# EAGLE board Voltometria Ciclica (EAGLE 7.6.0)

Size 73.58 x 101.49 mm. Coordinates in mm from the lower left corner, seen from the top.
Outline: 0,0 56.82,0 56.82,53.33 0,53.33 0,0
Copper layers (1*16): Top 0.035mm / dielectric 1.5mm / Bottom 0.035mm
Design rules "default": minimum track width 10mil, minimum drill 24mil, track to track 8mil, track to pad 8mil, pad to pad 8mil, via to via 8mil, smd to smd 8mil, copper to edge 40mil, drill to drill 8mil, minimum pad ring 10mil, minimum via ring 8mil, stop-mask expansion 4mil, vias tented up to drill 0mil, thermal gap 10mil

## Footprints (pad centres in the part's own frame; a part is rotated, then mirrored left to right if it is on the bottom)
C5B2.5 = drill 0.813 pad 1.6 octagon: 1 -2.54,0; 2 2.54,0
LED5MM = drill 0.813 octagon: A -1.27,0; K 1.27,0
DC-POWER = drill 0.889 pad 2.54 octagon: + 0,2.54; - 0,-2.54
2P-2.54-65/35MIL = drill 0.889 pad 1.651 square: 1 0,1.27 | drill 0.889 pad 1.651: 2 0,-1.27
0207/10 = drill 0.813 octagon: 1 -5.08,0; 2 5.08,0
B25V = drill 0.813 long: A 2.54,0.635; E -2.54,0.635; S 0,0.635
DIL08 = drill 0.813 pad 1.27: 1 -3.81,-3.81; 2 -1.27,-3.81; 3 1.27,-3.81; 4 3.81,-3.81; 5 3.81,3.81; 6 1.27,3.81; 7 -1.27,3.81; 8 -3.81,3.81
ARDUINO_UNO = drill 1.016 pad 1.88: 0 63.5,50.8; 1 60.96,50.8; 2 58.42,50.8; 3 55.88,50.8; 3.3V 35.56,2.54; 4 53.34,50.8; 5 50.8,50.8; 5V 38.1,2.54; 6 48.26,50.8; 7 45.72,50.8; 8 41.656,50.8; 9 39.116,50.8; 10 36.576,50.8; 11 34.036,50.8; 12 31.496,50.8; 13 28.956,50.8; A0 50.8,2.54; A1 53.34,2.54; A2 55.88,2.54; A3 58.42,2.54; A4 60.96,2.54; A5 63.5,2.54; AREF 23.876,50.8; GND 26.416,50.8; GND. 43.18,2.54; GND.. 40.64,2.54; I/OREF 30.48,2.54; N/C 27.94,2.54; RESET 33.02,2.54; SCL 18.796,50.8; SDA 21.336,50.8; VIN 45.72,2.54 | hole 3.2: 66.04,7.62; 66.04,35.56; 15.24,50.8; 13.97,2.54
D-7.5 = drill 0.813 long: A 3.81,0; C -3.81,0

## Placement (x,y rotation side)
C1  470nF  [C5B2.5]  5,98.98 0 top
C2  100nF  [C5B2.5]  5,137.08 0 top  (outside the outline)
C3  100nF  [C5B2.5]  5,187.88 0 top  (outside the outline)
D1  [LED5MM]  5,213.28 0 top  (outside the outline)
Meter6  [DC-POWER]  5,276.78 0 top  (outside the outline)
P1  5V  [2P-2.54-65/35MIL]  5,225.98 0 top  (outside the outline)
P2  5V  [2P-2.54-65/35MIL]  5,264.08 0 top  (outside the outline)
P4  5V  [2P-2.54-65/35MIL]  5,251.38 0 top  (outside the outline)
R1  10k‎Ω  [0207/10]  5,60.88 0 top
R2  510‎Ω  [0207/10]  5,111.68 0 top  (outside the outline)
R3  200‎Ω  [0207/10]  5,124.38 0 top  (outside the outline)
R4  1k‎Ω  [0207/10]  5,149.78 0 top  (outside the outline)
R5  24k‎Ω  [0207/10]  5,162.48 0 top  (outside the outline)
R6  12k‎Ω  [0207/10]  5,175.18 0 top  (outside the outline)
R7  200k‎Ω  [0207/10]  5,238.68 0 top  (outside the outline)
Rpot2  250k‎Ω  [B25V]  5,289.48 0 top  (outside the outline)
U2  [DIL08]  5,10.08 0 top
U5  [ARDUINO_UNO]  5,48.18 0 top
U6  [DIL08]  5,22.78 0 top
U7  [DIL08]  5,35.48 0 top
U8  [DIL08]  5,73.58 0 top
U9  [DIL08]  5,86.28 0 top
U10  [D-7.5]  5,200.58 0 top  (outside the outline)

## Library data of the parts
C1-C3 D1 Meter6 P1 P2 P4 R1-R7 Rpot2 U2 U5-U10 = AUTODESK_CIRCUITS_BREADBOARD

## Nets
N$1: Meter6.+ R1.2 U5.10
N$2: C1.1 R1.1 U6.3
N$3: U6.5
N$4: U6.1
N$5: U6.8
N$6: R2.2 U6.2 U6.6
N$7: C2.1 R2.1 R3.2 R4.1 U2.2
N$8: U8.5
N$9: U8.1
N$10: U8.8
N$11: C2.2 R3.1 U2.6 U8.3
N$12: U2.5
N$13: U2.1
N$14: U2.8
N$15: U7.5
N$16: P4.1 U2.4 U6.4 U7.4 U8.4 U9.4
N$17: U7.1
N$18: U7.8
N$19: U9.5
N$20: U9.1
N$21: U9.8
N$22: U5.A0 U9.2 U9.6 U10.C
N$23: D1.A U10.A
N$24: D1.K R7.2
N$25: C3.2 R6.2 U7.6 U9.3
N$26: P1.1 R4.2 R5.2
N$27: C1.2 Meter6.- P1.2 P2.1 P4.2 U2.3 U5.GND
N$28: R7.1 U5.GND.. U7.3
N$29: P2.2 U2.7 U6.7 U7.7 U8.7 U9.7
N$30: Rpot2.A U8.6
N$31: Rpot2.S U8.2
N$32: C3.1 R5.1 R6.1 Rpot2.E U7.2

## Tracks (layer width: path | path; a pad name or v marks a point on that pad's centre or on a via)
N$1  (2 unrouted)
N$2  (2 unrouted)
N$6  (2 unrouted)
N$7  (4 unrouted)
N$11  (3 unrouted)
N$16  (5 unrouted)
N$22  (3 unrouted)
N$23  (1 unrouted)
N$24  (1 unrouted)
N$25  (3 unrouted)
N$26  (2 unrouted)
N$27  (6 unrouted)
N$28  (2 unrouted)
N$29  (5 unrouted)
N$30  (1 unrouted)
N$31  (1 unrouted)
N$32  (4 unrouted)